# Altium PCB 333.PcbDoc (part 1 of 4)
Units mil, origin at the board's own origin, x right, y up, seen from the top; angles counter-clockwise.
Board outline 3897.64 x 5283.46 mil, 2 copper layers (Top Layer, Bottom Layer); 160 components, 17 nets, 480 pads, 300 vias.
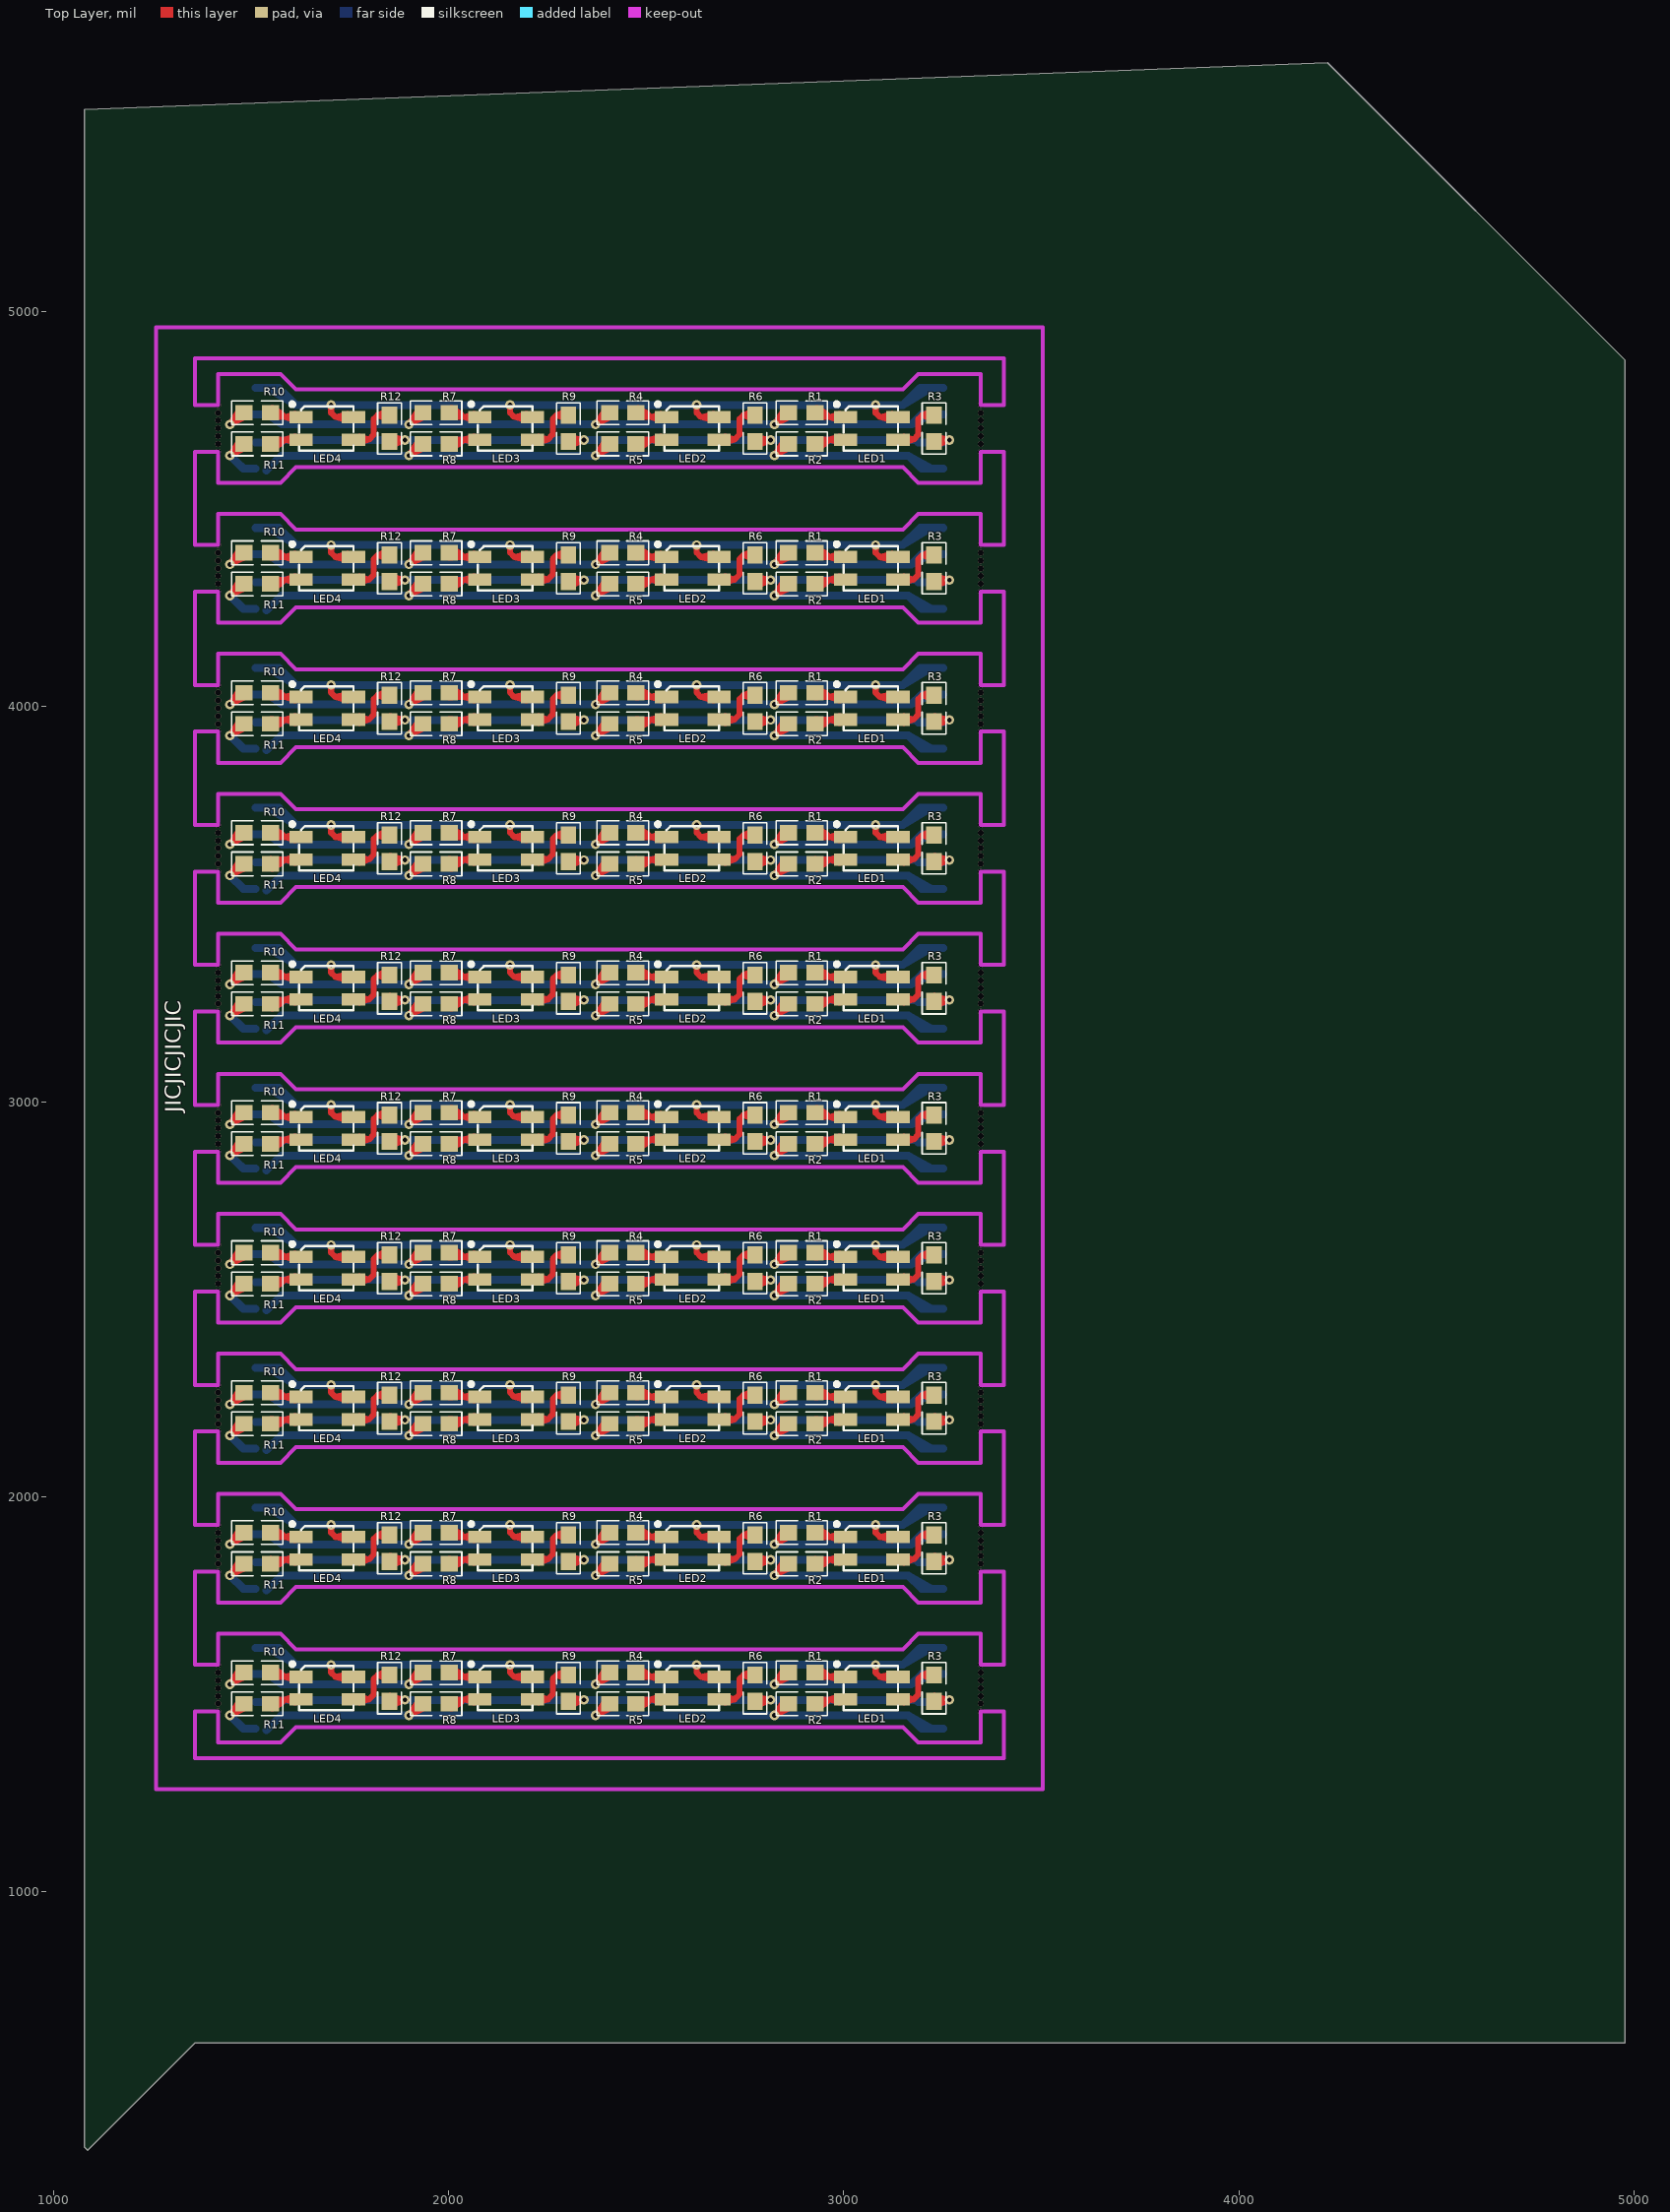
[diagram p0: Top Layer view]
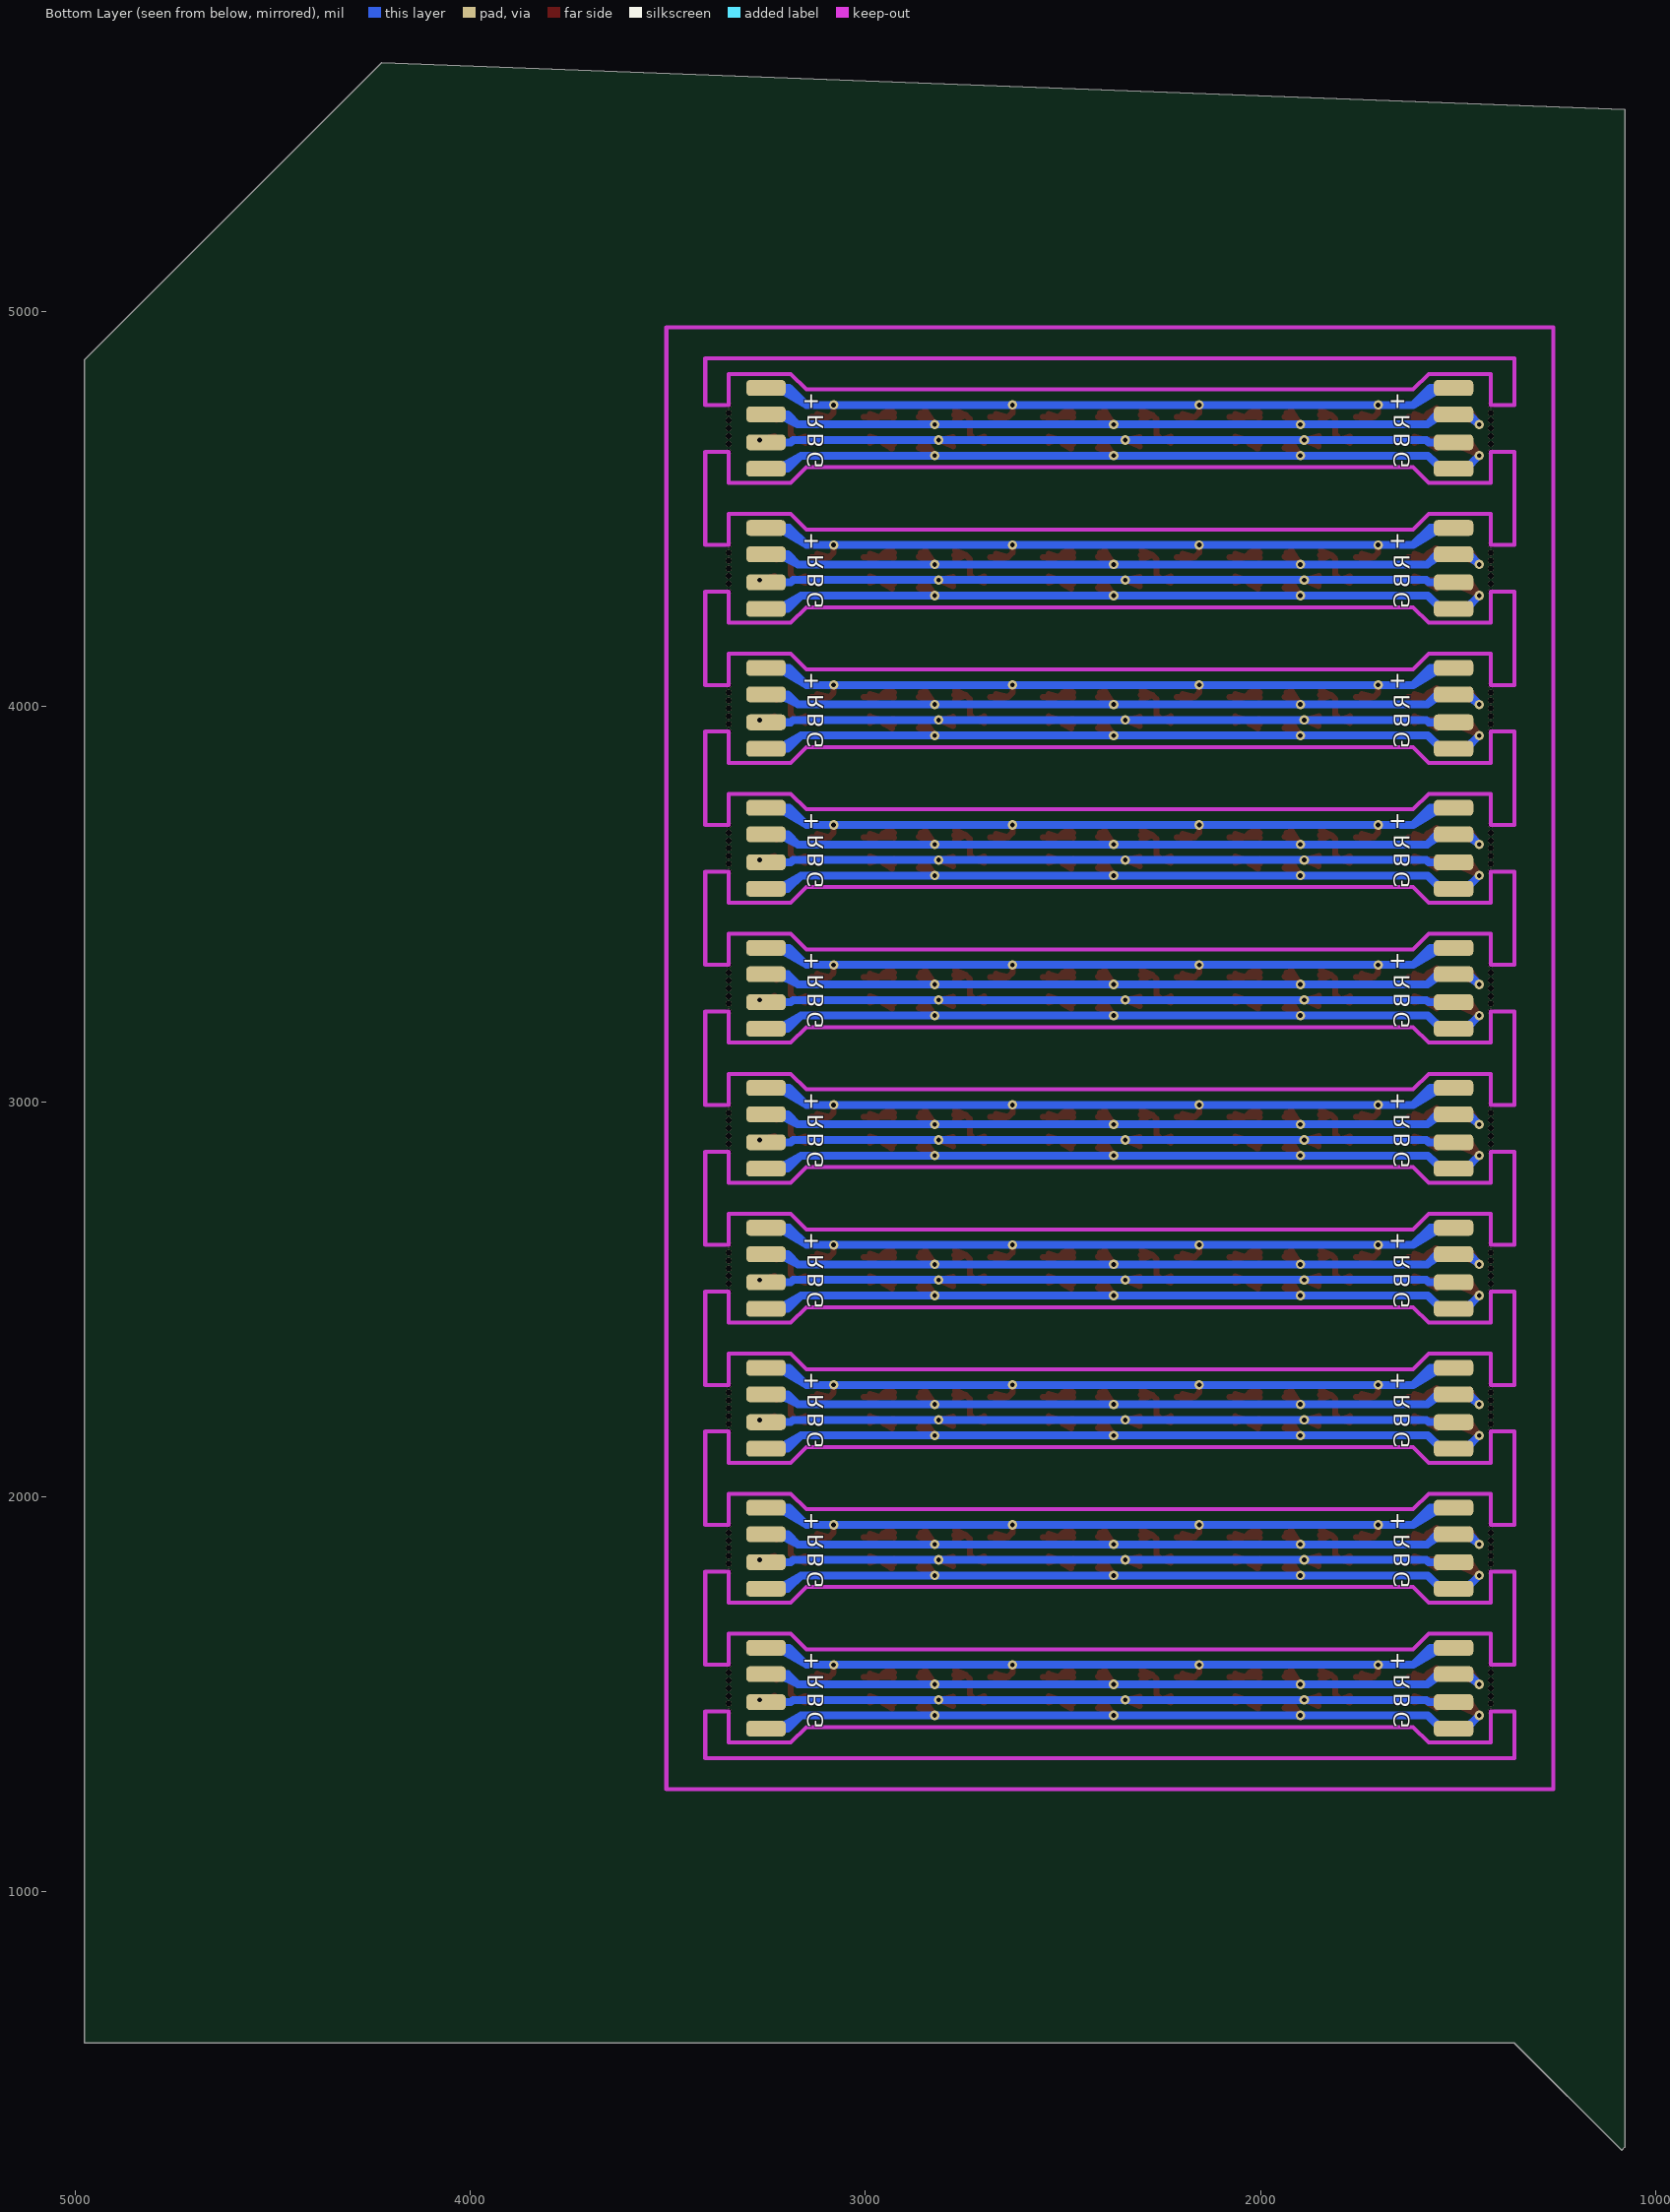
[diagram p1: Bottom Layer view, seen from below]

## Layer stack, top to bottom
Top Layer: signal copper 1.4
Dielectric: dielectric 12.6, FR-4, Dk 4.8
Bottom Layer: signal copper 1.4

## Board outline
1078.74,5511.81 1078.74,354.33 1086.61,346.46 1358.27,618.11 4976.38,618.11 4976.38,4877.95 4224.41,5629.92

## Design rules (kind name [scope] priority, off if disabled: settings)
Clearance [All] p1: gap=10
PolygonConnect [All] p1: connectstyle=Relief reliefconductorwidth=10 reliefentries=4 polygonreliefangle="90 Angle" airgapwidth=10
RoutingVias [All] p1: holewidth=28 width=50 viastyle="Through Hole" minholewidth=28 minwidth=50 maxholewidth=28 maxwidth=50
SolderMaskExpansion [All] p1: expansion=4
Width [All] p1: maxlimit=100 minlimit=10 preferedwidth=10
28 further rules are at their usual default settings.

## Classes and differential pairs
component class 222: LED1 LED2 LED4 R1 R2 R3 R4 R5 R6 R7 R8 R9 R10 R11 R12

## Components (designator, comment, footprint, x,y, rotation, side; value= is the part's Value field where it differs from the comment)
LED1 "RGB-3528" "LED 3528-4Pin" 3070.87,1870.08 r0 top
LED1 "RGB-3528" "LED 3528-4Pin" 3070.87,1515.75 r0 top
LED1 "RGB-3528" "LED 3528-4Pin" 3070.87,2224.41 r0 top
LED1 "RGB-3528" "LED 3528-4Pin" 3070.87,2578.74 r0 top
LED1 "RGB-3528" "LED 3528-4Pin" 3070.87,3996.06 r0 top
LED1 "RGB-3528" "LED 3528-4Pin" 3070.87,3641.73 r0 top
LED1 "RGB-3528" "LED 3528-4Pin" 3070.87,2933.07 r0 top
LED1 "RGB-3528" "LED 3528-4Pin" 3070.87,3287.4 r0 top
LED1 "RGB-3528" "LED 3528-4Pin" 3070.87,4350.39 r0 top
LED1 "RGB-3528" "LED 3528-4Pin" 3070.87,4704.72 r0 top
LED2 "RGB-3528" "LED 3528-4Pin" 2618.11,1870.08 r0 top
LED2 "RGB-3528" "LED 3528-4Pin" 2618.11,1515.75 r0 top
LED2 "RGB-3528" "LED 3528-4Pin" 2618.11,2224.41 r0 top
LED2 "RGB-3528" "LED 3528-4Pin" 2618.11,2578.74 r0 top
LED2 "RGB-3528" "LED 3528-4Pin" 2618.11,3996.06 r0 top
LED2 "RGB-3528" "LED 3528-4Pin" 2618.11,3641.73 r0 top
LED2 "RGB-3528" "LED 3528-4Pin" 2618.11,2933.07 r0 top
LED2 "RGB-3528" "LED 3528-4Pin" 2618.11,3287.4 r0 top
LED2 "RGB-3528" "LED 3528-4Pin" 2618.11,4350.39 r0 top
LED2 "RGB-3528" "LED 3528-4Pin" 2618.11,4704.72 r0 top
LED3 "RGB-3528" "LED 3528-4Pin" 2145.67,1870.08 r0 top
LED3 "RGB-3528" "LED 3528-4Pin" 2145.67,1515.75 r0 top
LED3 "RGB-3528" "LED 3528-4Pin" 2145.67,2224.41 r0 top
LED3 "RGB-3528" "LED 3528-4Pin" 2145.67,2578.74 r0 top
LED3 "RGB-3528" "LED 3528-4Pin" 2145.67,3996.06 r0 top
LED3 "RGB-3528" "LED 3528-4Pin" 2145.67,3641.73 r0 top
LED3 "RGB-3528" "LED 3528-4Pin" 2145.67,2933.07 r0 top
LED3 "RGB-3528" "LED 3528-4Pin" 2145.67,3287.4 r0 top
LED3 "RGB-3528" "LED 3528-4Pin" 2145.67,4350.39 r0 top
LED3 "RGB-3528" "LED 3528-4Pin" 2145.67,4704.72 r0 top
LED4 "RGB-3528" "LED 3528-4Pin" 1692.91,1870.08 r0 top
LED4 "RGB-3528" "LED 3528-4Pin" 1692.91,1515.75 r0 top
LED4 "RGB-3528" "LED 3528-4Pin" 1692.91,2224.41 r0 top
LED4 "RGB-3528" "LED 3528-4Pin" 1692.91,2578.74 r0 top
LED4 "RGB-3528" "LED 3528-4Pin" 1692.91,3996.06 r0 top
LED4 "RGB-3528" "LED 3528-4Pin" 1692.91,3641.73 r0 top
LED4 "RGB-3528" "LED 3528-4Pin" 1692.91,2933.07 r0 top
LED4 "RGB-3528" "LED 3528-4Pin" 1692.91,3287.4 r0 top
LED4 "RGB-3528" "LED 3528-4Pin" 1692.91,4350.39 r0 top
LED4 "RGB-3528" "LED 3528-4Pin" 1692.91,4704.72 r0 top
R1 "Res1" 0603-1 2893.7,1909.45 r180 top
R1 "Res1" 0603-1 2893.7,1555.12 r180 top
R1 "Res1" 0603-1 2893.7,2263.78 r180 top
R1 "Res1" 0603-1 2893.7,2618.11 r180 top
R1 "Res1" 0603-1 2893.7,4035.43 r180 top
R1 "Res1" 0603-1 2893.7,3681.1 r180 top
R1 "Res1" 0603-1 2893.7,2972.44 r180 top
R1 "Res1" 0603-1 2893.7,3326.77 r180 top
R1 "Res1" 0603-1 2893.7,4389.76 r180 top
R1 "Res1" 0603-1 2893.7,4744.09 r180 top
R2 "Res1" 0603-1 2893.7,1830.71 r180 top
R2 "Res1" 0603-1 2893.7,1476.38 r180 top
R2 "Res1" 0603-1 2893.7,2185.04 r180 top
R2 "Res1" 0603-1 2893.7,2539.37 r180 top
R2 "Res1" 0603-1 2893.7,3956.69 r180 top
R2 "Res1" 0603-1 2893.7,3602.36 r180 top
R2 "Res1" 0603-1 2893.7,2893.7 r180 top
R2 "Res1" 0603-1 2893.7,3248.03 r180 top
R2 "Res1" 0603-1 2893.7,4311.02 r180 top
R2 "Res1" 0603-1 2893.7,4665.35 r180 top
R3 "Res1" 0603-1 3228.35,1870.08 r270 top
R3 "Res1" 0603-1 3228.35,1515.75 r270 top
R3 "Res1" 0603-1 3228.35,2224.41 r270 top
R3 "Res1" 0603-1 3228.35,2578.74 r270 top
R3 "Res1" 0603-1 3228.35,3996.06 r270 top
R3 "Res1" 0603-1 3228.35,3641.73 r270 top
R3 "Res1" 0603-1 3228.35,2933.07 r270 top
R3 "Res1" 0603-1 3228.35,3287.4 r270 top
R3 "Res1" 0603-1 3228.35,4350.39 r270 top
R3 "Res1" 0603-1 3228.35,4704.72 r270 top
R4 "Res1" 0603-1 2440.94,1909.45 r180 top
R4 "Res1" 0603-1 2440.94,1555.12 r180 top
R4 "Res1" 0603-1 2440.94,2263.78 r180 top
R4 "Res1" 0603-1 2440.94,2618.11 r180 top
R4 "Res1" 0603-1 2440.94,4035.43 r180 top
R4 "Res1" 0603-1 2440.94,3681.1 r180 top
R4 "Res1" 0603-1 2440.94,2972.44 r180 top
R4 "Res1" 0603-1 2440.94,3326.77 r180 top
R4 "Res1" 0603-1 2440.94,4389.76 r180 top
R4 "Res1" 0603-1 2440.94,4744.09 r180 top
R5 "Res1" 0603-1 2440.94,1830.71 r180 top
R5 "Res1" 0603-1 2440.94,1476.38 r180 top
R5 "Res1" 0603-1 2440.94,2185.04 r180 top
R5 "Res1" 0603-1 2440.94,2539.37 r180 top
R5 "Res1" 0603-1 2440.94,3956.69 r180 top
R5 "Res1" 0603-1 2440.94,3602.36 r180 top
R5 "Res1" 0603-1 2440.94,2893.7 r180 top
R5 "Res1" 0603-1 2440.94,3248.03 r180 top
R5 "Res1" 0603-1 2440.94,4311.02 r180 top
R5 "Res1" 0603-1 2440.94,4665.35 r180 top
R6 "Res1" 0603-1 2775.59,1870.08 r270 top
R6 "Res1" 0603-1 2775.59,1515.75 r270 top
R6 "Res1" 0603-1 2775.59,2224.41 r270 top
R6 "Res1" 0603-1 2775.59,2578.74 r270 top
R6 "Res1" 0603-1 2775.59,3996.06 r270 top
R6 "Res1" 0603-1 2775.59,3641.73 r270 top
R6 "Res1" 0603-1 2775.59,2933.07 r270 top
R6 "Res1" 0603-1 2775.59,3287.4 r270 top
R6 "Res1" 0603-1 2775.59,4350.39 r270 top
R6 "Res1" 0603-1 2775.59,4704.72 r270 top
R7 "Res1" 0603-1 1968.5,1909.45 r180 top
R7 "Res1" 0603-1 1968.5,1555.12 r180 top
R7 "Res1" 0603-1 1968.5,2263.78 r180 top
R7 "Res1" 0603-1 1968.5,2618.11 r180 top
R7 "Res1" 0603-1 1968.5,4035.43 r180 top
R7 "Res1" 0603-1 1968.5,3681.1 r180 top
R7 "Res1" 0603-1 1968.5,2972.44 r180 top
R7 "Res1" 0603-1 1968.5,3326.77 r180 top
R7 "Res1" 0603-1 1968.5,4389.76 r180 top
R7 "Res1" 0603-1 1968.5,4744.09 r180 top
R8 "Res1" 0603-1 1968.5,1830.71 r180 top
R8 "Res1" 0603-1 1968.5,1476.38 r180 top
R8 "Res1" 0603-1 1968.5,2185.04 r180 top
R8 "Res1" 0603-1 1968.5,2539.37 r180 top
R8 "Res1" 0603-1 1968.5,3956.69 r180 top
R8 "Res1" 0603-1 1968.5,3602.36 r180 top
R8 "Res1" 0603-1 1968.5,2893.7 r180 top
R8 "Res1" 0603-1 1968.5,3248.03 r180 top
R8 "Res1" 0603-1 1968.5,4311.02 r180 top
R8 "Res1" 0603-1 1968.5,4665.35 r180 top
R9 "Res1" 0603-1 2303.15,1870.08 r270 top
R9 "Res1" 0603-1 2303.15,1515.75 r270 top
R9 "Res1" 0603-1 2303.15,2224.41 r270 top
R9 "Res1" 0603-1 2303.15,2578.74 r270 top
R9 "Res1" 0603-1 2303.15,3996.06 r270 top
R9 "Res1" 0603-1 2303.15,3641.73 r270 top
R9 "Res1" 0603-1 2303.15,2933.07 r270 top
R9 "Res1" 0603-1 2303.15,3287.4 r270 top
R9 "Res1" 0603-1 2303.15,4350.39 r270 top
R9 "Res1" 0603-1 2303.15,4704.72 r270 top
R10 "Res1" 0603-1 1515.75,1909.45 r180 top
R10 "Res1" 0603-1 1515.75,1555.12 r180 top
R10 "Res1" 0603-1 1515.75,2263.78 r180 top
R10 "Res1" 0603-1 1515.75,2618.11 r180 top
R10 "Res1" 0603-1 1515.75,4035.43 r180 top
R10 "Res1" 0603-1 1515.75,3681.1 r180 top
R10 "Res1" 0603-1 1515.75,2972.44 r180 top
R10 "Res1" 0603-1 1515.75,3326.77 r180 top
R10 "Res1" 0603-1 1515.75,4389.76 r180 top
R10 "Res1" 0603-1 1515.75,4744.09 r180 top
R11 "Res1" 0603-1 1515.75,1830.71 r180 top
R11 "Res1" 0603-1 1515.75,1476.38 r180 top
R11 "Res1" 0603-1 1515.75,2185.04 r180 top
R11 "Res1" 0603-1 1515.75,2539.37 r180 top
R11 "Res1" 0603-1 1515.75,3956.69 r180 top
R11 "Res1" 0603-1 1515.75,3602.36 r180 top
R11 "Res1" 0603-1 1515.75,2893.7 r180 top
R11 "Res1" 0603-1 1515.75,3248.03 r180 top
R11 "Res1" 0603-1 1515.75,4311.02 r180 top
R11 "Res1" 0603-1 1515.75,4665.35 r180 top
R12 "Res1" 0603-1 1850.39,1870.08 r270 top
R12 "Res1" 0603-1 1850.39,1515.75 r270 top
R12 "Res1" 0603-1 1850.39,2224.41 r270 top
R12 "Res1" 0603-1 1850.39,2578.74 r270 top
R12 "Res1" 0603-1 1850.39,3996.06 r270 top
R12 "Res1" 0603-1 1850.39,3641.73 r270 top
R12 "Res1" 0603-1 1850.39,2933.07 r270 top
R12 "Res1" 0603-1 1850.39,3287.4 r270 top
R12 "Res1" 0603-1 1850.39,4350.39 r270 top
R12 "Res1" 0603-1 1850.39,4704.72 r270 top

## Footprints (in the part's own frame and the unit in brackets; to place one, negate y for a bottom-side part, rotate by r counter-clockwise, add the part's x,y. Pads: shape width x height; smd on the part's side, far side on the other; paste and mask are expansions set on the pad)
0603-1 [mm] "贴片带丝印"
  rect 1.1x1 smd: 1(-0.85,0) 2(0.85,0)
  silkscreen extent -1.65,-0.76 1.65,0.76, body extent -1.14,-0.38 1.14,0.38, height 1
"LED 3528-4Pin" [mm] "4脚，3528LED"
  rect 1.5x0.8 smd: 1(-1.689,0.725) 2(-1.689,-0.725) 3(1.689,-0.725) 4(1.689,0.725)
  silkscreen extent -2.37,-1.42 1.69,1.68, body extent -1.75,-1.4 1.75,1.4, height 1.95

## Part data
LED1 LED1 LED1 LED1 LED1 LED1 LED1 LED1 LED1 LED1 LED2 LED2 LED2 LED2 LED2 LED2 LED2 LED2 LED2 LED2 LED3 LED3 LED3 LED3 LED3 LED3 LED3 LED3 LED3 LED3 LED4 LED4 LED4 LED4 LED4 LED4 LED4 LED4 LED4 LED4: library part LED-RGB-3528, "三基色LED"
R1 R1 R1 R1 R1 R1 R1 R1 R1 R1 R2 R2 R2 R2 R2 R2 R2 R2 R2 R2 R3 R3 R3 R3 R3 R3 R3 R3 R3 R3 R4 R4 R4 R4 R4 R4 R4 R4 R4 R4 R5 R5 R5 R5 R5 R5 R5 R5 R5 R5 R6 R6 R6 R6 R6 R6 R6 R6 R6 R6 R7 R7 R7 R7 R7 R7 R7 R7 R7 R7 R8 R8 R8 R8 R8 R8 R8 R8 R8 R8 R9 R9 R9 R9 R9 R9 R9 R9 R9 R9 R10 R10 R10 R10 R10 R10 R10 R10 R10 R10 R11 R11 R11 R11 R11 R11 R11 R11 R11 R11 R12 R12 R12 R12 R12 R12 R12 R12 R12 R12: "贴片电阻"

## Free pads (board coordinates)
  rrect50% 100x40 smd far side: 2(1511.81,1413.39) 2(1511.81,1480.32) 2(1511.81,1551.18) 2(1511.81,1618.11) 2(1511.81,1767.72) 2(1511.81,1834.65) 2(1511.81,1905.51) 2(1511.81,1972.44) 2(1511.81,2122.05) 2(1511.81,2188.98) 2(1511.81,2259.84) 2(1511.81,2326.77) 2(1511.81,2476.38) 2(1511.81,2543.31) 2(1511.81,2614.17) 2(1511.81,2681.1) 2(1511.81,2830.71) 2(1511.81,2897.64) 2(1511.81,2968.5) 2(1511.81,3035.43) 2(1511.81,3185.04) 2(1511.81,3251.97) 2(1511.81,3322.83) 2(1511.81,3389.76) 2(1511.81,3539.37) 2(1511.81,3606.3) 2(1511.81,3677.17) 2(1511.81,3744.09) 2(1511.81,3893.7) 2(1511.81,3960.63) 2(1511.81,4031.5) 2(1511.81,4098.43) 2(1511.81,4248.03) 2(1511.81,4314.96) 2(1511.81,4385.83) 2(1511.81,4452.76) 2(1511.81,4602.36) 2(1511.81,4669.29) 2(1511.81,4740.16) 2(1511.81,4807.09) 2(3251.97,1413.39) 2(3251.97,1480.32) 2(3251.97,1551.18) 2(3251.97,1618.11) 2(3251.97,1767.72) 2(3251.97,1834.65) 2(3251.97,1905.51) 2(3251.97,1972.44) 2(3251.97,2122.05) 2(3251.97,2188.98) 2(3251.97,2259.84) 2(3251.97,2326.77) 2(3251.97,2476.38) 2(3251.97,2543.31) 2(3251.97,2614.17) 2(3251.97,2681.1) 2(3251.97,2830.71) 2(3251.97,2897.64) 2(3251.97,2968.5) 2(3251.97,3035.43) 2(3251.97,3185.04) 2(3251.97,3251.97) 2(3251.97,3322.83) 2(3251.97,3389.76) 2(3251.97,3539.37) 2(3251.97,3606.3) 2(3251.97,3677.17) 2(3251.97,3744.09) 2(3251.97,3893.7) 2(3251.97,3960.63) 2(3251.97,4031.5) 2(3251.97,4098.43) 2(3251.97,4248.03) 2(3251.97,4314.96) 2(3251.97,4385.83) 2(3251.97,4452.76) 2(3251.97,4602.36) 2(3251.97,4669.29) 2(3251.97,4740.16) 2(3251.97,4807.09)

## Via types
v1: diameter 24, hole 12, Top Layer to Bottom Layer, 160 vias
v2: diameter 15, hole 15, Top Layer to Bottom Layer, 140 vias

## Nets (pads, with @x,y where several pads share a name; then routed paths per layer and width w, separated by ;. In a path a pad name is that pad's centre, name@x,y a point inside that pad or via, vN(x,y) a via of type N, cw(c..) or ccw(c..) an arc to the next point about the centre after c; other vN are vias at no path point)
B: pad.2@1511.81,1834.65 pad.2@3251.97,1834.65 R3.2@3228.35,1836.61 R6.2@2775.59,1836.61 R9.2@2303.15,1836.61 R12.2@1850.39,1836.61 | length 3790.4
  Top Layer w15: R12.2@1850.39,1836.61 v1(1889.76,1840.55) ; R12.2@1850.39,1836.61 v1(1889.76,1840.55) ; R12.2@1850.39,1836.61 1875.98,1836.61 ; R12.2@1850.39,1836.61 1875.98,1836.61 ; R12.2@1853.29,1824.78 v1(1889.76,1840.55) ; R12.2@1853.29,1824.78 v1(1889.76,1840.55) ; R12.2@1853.29,1824.78 1875.98,1836.61 ; R12.2@1853.29,1824.78 1875.98,1836.61 ; R12.2@1853.29,1848.45 v1(1889.76,1840.55) ; R12.2@1853.29,1848.45 v1(1889.76,1840.55) ; R12.2@1853.29,1848.45 1875.98,1836.61 ; R12.2@1853.29,1848.45 1875.98,1836.61 ; 1875.98,1836.61 v1(1889.76,1840.55) ; 1875.98,1836.61 v1(1889.76,1840.55) ; 1875.98,1836.61 v1(1889.76,1840.55) ; 1875.98,1836.61 v1(1889.76,1840.55) ; 1875.98,1836.61 v1(1889.76,1840.55) ; 1875.98,1836.61 v1(1889.76,1840.55) ; 1875.98,1836.61 v1(1889.76,1840.55) ; 1875.98,1836.61 v1@1879.92,1840.55 ; v1@1879.92,1840.55 1850.39,1838.58 v1(1889.76,1840.55) ; v1@1879.92,1840.55 1853.69,1826.85 v1(1889.76,1840.55) ; v1@1879.92,1840.55 1852.1,1850.65 v1(1889.76,1840.55) ; v1@1879.92,1840.55 v1(1889.76,1840.55) ; 2328.74,1836.61 v1(2342.52,1840.55) ; 2328.74,1836.61 v1(2342.52,1840.55) ; 2328.74,1836.61 v1(2342.52,1840.55) ; 2328.74,1836.61 2306.05,1824.78 v1(2342.52,1840.55) ; 2328.74,1836.61 2306.05,1848.45 v1(2342.52,1840.55) ; 2328.74,1836.61 R9.2@2303.15,1836.61 v1(2342.52,1840.55) ; 2801.18,1836.61 v1(2814.96,1840.55) ; 2801.18,1836.61 v1(2814.96,1840.55) ; 2801.18,1836.61 v1(2814.96,1840.55) ; 2801.18,1836.61 2778.49,1824.78 v1(2814.96,1840.55) ; 2801.18,1836.61 2778.49,1848.45 v1(2814.96,1840.55) ; 2801.18,1836.61 R6.2@2775.59,1836.61 v1(2814.96,1840.55) ; R3.2@3228.35,1836.61 v1(3267.72,1840.55) ; R3.2@3228.35,1836.61 v1(3267.72,1840.55) ; R3.2@3228.35,1836.61 3253.94,1836.61 ; R3.2@3228.35,1836.61 3253.94,1836.61 ; R3.2@3231.25,1824.78 v1(3267.72,1840.55) ; R3.2@3231.25,1824.78 v1(3267.72,1840.55) ; R3.2@3231.25,1824.78 3253.94,1836.61 ; R3.2@3231.25,1824.78 3253.94,1836.61 ; R3.2@3231.25,1848.45 v1(3267.72,1840.55) ; R3.2@3231.25,1848.45 v1(3267.72,1840.55) ; R3.2@3231.25,1848.45 3253.94,1836.61 ; R3.2@3231.25,1848.45 3253.94,1836.61 ; 3253.94,1836.61 v1(3267.72,1840.55) ; 3253.94,1836.61 v1(3267.72,1840.55) ; 3253.94,1836.61 v1(3267.72,1840.55) ; 3253.94,1836.61 v1(3267.72,1840.55) ; 3253.94,1836.61 v1(3267.72,1840.55) ; 3253.94,1836.61 v1(3267.72,1840.55) ; 3253.94,1836.61 v1(3267.72,1840.55) ; 3253.94,1836.61 v1@3257.87,1840.55 ; v1@3257.87,1840.55 3228.35,1838.58 v1(3267.72,1840.55) ; v1@3257.87,1840.55 3231.64,1826.85 v1(3267.72,1840.55) ; v1@3257.87,1840.55 3230.06,1850.65 v1(3267.72,1840.55) ; v1@3257.87,1840.55 v1(3267.72,1840.55)
  Bottom Layer w20: pad.2@1511.81,1834.65 1574.8,1834.65 ; pad.2@1541.81,1834.65 1574.8,1834.65 ; 3194.71,1834.65 v1(3267.72,1840.55) pad.2@3251.97,1834.65 3188.98,1834.65 ; pad.2@3221.97,1834.65 3188.98,1834.65 ; 1574.8,1834.65 1580.71,1840.55 v1(1889.76,1840.55) v1(2342.52,1840.55) v1(2814.96,1840.55) 3183.07,1840.55 3188.98,1834.65
G: pad.2@1511.81,1767.72 pad.2@3251.97,1767.72 R2.2@2860.24,1830.71 R5.2@2407.48,1830.71 R8.2@1935.04,1830.71 R11.2@1482.28,1830.71 | length 2761.5
  Top Layer w15: R11.2@1471.08,1838.66 v1(1446.85,1801.18) ; R11.2@1480.31,1830.71 v1(1446.85,1801.18) ; R11.2@1482.28,1830.71 1476.38,1830.71 v1(1446.85,1801.18) ; R11.2@1487.05,1820.56 v1(1446.85,1801.18) ; R8.2@1923.84,1838.66 v1(1899.61,1801.18) ; R8.2@1933.07,1830.71 v1(1899.61,1801.18) ; R8.2@1935.04,1830.71 1929.13,1830.71 v1(1899.61,1801.18) ; R8.2@1939.81,1820.56 v1(1899.61,1801.18) ; R5.2@2396.28,1838.66 v1(2372.05,1801.18) ; R5.2@2405.51,1830.71 v1(2372.05,1801.18) ; R5.2@2407.48,1830.71 2401.57,1830.71 v1(2372.05,1801.18) ; R5.2@2412.25,1820.56 v1(2372.05,1801.18) ; R2.2@2849.03,1838.66 v1(2824.8,1801.18) ; R2.2@2858.27,1830.71 v1(2824.8,1801.18) ; R2.2@2860.24,1830.71 2854.33,1830.71 v1(2824.8,1801.18) ; R2.2@2865.01,1820.56 v1(2824.8,1801.18)
  Bottom Layer w20: pad.2@1481.81,1767.72 v1(1446.85,1801.18) 1480.32,1767.72 pad.2@1511.81,1767.72 ; pad.2@1539.37,1763.78 1576.77,1801.18 ; pad.2@1541.81,1767.72 1576.77,1801.18 ; pad.2@3251.97,1767.72 3196.85,1767.72 ; 1576.77,1801.18 v1(1899.61,1801.18) v1(2372.05,1801.18) v1(2824.8,1801.18) 3163.39,1801.18 ; 3163.39,1801.18 pad.2@3221.97,1767.72 ; 3163.39,1801.18 3196.85,1767.72 ; 3196.85,1767.72 pad.2@3221.97,1767.72 ; 3196.85,1767.72 pad.2@3221.97,1767.72
GND: 
NetLED1_1: LED1.1@3004.37,1898.62 R1.1@2927.17,1909.45 | length 412.8
  Top Layer w15: R1.1@2927.17,1909.45 2952.76,1909.45 ; R1.1@2927.49,1897.37 2963.58,1898.62 ; R1.1@2934.7,1920.29 2963.58,1898.62 ; LED1.1@2989.33,1890.47 2963.58,1898.62 ; LED1.1@2989.33,1906.77 2963.58,1898.62 ; LED1.1@2990.59,1898.62 2963.58,1898.62 ; LED1.1@3004.37,1898.62 2963.58,1898.62 ; R1.1@2929.13,1909.45 2952.76,1909.45 ; R1.1@2929.13,1909.45 2952.76,1909.45 ; R1.1@2929.13,1909.45 2963.58,1898.62 ; 2952.76,1909.45 2932.28,1897.68 2952.76,1909.45 ; 2952.76,1909.45 2932.28,1921.22 2952.76,1909.45 ; 2952.76,1909.45 2963.58,1898.62
NetLED1_2: LED1.2@3004.37,1841.54 R2.1@2927.17,1830.71 | length 412.8
  Top Layer w15: R2.1@2927.17,1830.71 2952.76,1830.71 ; R2.1@2927.49,1842.78 2963.58,1841.54 ; R2.1@2934.7,1819.87 2963.58,1841.54 ; LED1.2@2989.33,1833.38 2963.58,1841.54 ; LED1.2@2989.33,1849.69 2963.58,1841.54 ; LED1.2@2990.59,1841.54 2963.58,1841.54 ; LED1.2@3004.37,1841.54 2963.58,1841.54 ; R2.1@2929.13,1830.71 2952.76,1830.71 ; R2.1@2929.13,1830.71 2952.76,1830.71 ; R2.1@2929.13,1830.71 2963.58,1841.54 ; 2952.76,1830.71 2932.28,1818.94 2952.76,1830.71 ; 2952.76,1830.71 2932.28,1842.48 2952.76,1830.71 ; 2952.76,1830.71 2963.58,1841.54
NetLED1_3: LED1.3@3137.37,1841.54 R3.1@3228.35,1903.54 | length 303.4
  Top Layer w15: LED1.3@3137.37,1841.54 3176.18,1841.54 ; LED1.3@3151.15,1841.54 3176.18,1841.54 ; LED1.3@3152.5,1833.4 3176.18,1841.54 ; LED1.3@3152.5,1849.67 3176.18,1841.54 ; R3.1@3225.83,1891.62 3198.82,1903.54 ; R3.1@3225.83,1915.47 3198.82,1903.54 ; 3176.18,1841.54 3188.98,1854.33 3188.98,1893.7 3198.82,1903.54 ; 3198.82,1903.54 R3.1@3228.35,1903.54 3198.82,1903.54
NetLED2_1: LED2.1@2551.61,1898.62 R4.1@2474.41,1909.45 | length 412.8
  Top Layer w15: R4.1@2474.41,1909.45 2500,1909.45 ; R4.1@2474.74,1897.37 2510.83,1898.62 ; R4.1@2481.94,1920.29 2510.83,1898.62 ; LED2.1@2536.57,1890.47 2510.83,1898.62 ; LED2.1@2536.57,1906.77 2510.83,1898.62 ; LED2.1@2537.83,1898.62 2510.83,1898.62 ; LED2.1@2551.61,1898.62 2510.83,1898.62 ; R4.1@2476.38,1909.45 2500,1909.45 ; R4.1@2476.38,1909.45 2500,1909.45 ; R4.1@2476.38,1909.45 2510.83,1898.62 ; 2500,1909.45 2479.52,1897.68 2500,1909.45 ; 2500,1909.45 2479.52,1921.22 2500,1909.45 ; 2500,1909.45 2510.83,1898.62
NetLED2_2: LED2.2@2551.61,1841.54 R5.1@2474.41,1830.71 | length 412.8
  Top Layer w15: R5.1@2474.41,1830.71 2500,1830.71 ; R5.1@2474.74,1842.78 2510.83,1841.54 ; R5.1@2481.94,1819.87 2510.83,1841.54 ; LED2.2@2536.57,1833.38 2510.83,1841.54 ; LED2.2@2536.57,1849.69 2510.83,1841.54 ; LED2.2@2537.83,1841.54 2510.83,1841.54 ; LED2.2@2551.61,1841.54 2510.83,1841.54 ; R5.1@2476.38,1830.71 2500,1830.71 ; R5.1@2476.38,1830.71 2500,1830.71 ; R5.1@2476.38,1830.71 2510.83,1841.54 ; 2500,1830.71 2479.52,1818.94 2500,1830.71 ; 2500,1830.71 2479.52,1842.48 2500,1830.71 ; 2500,1830.71 2510.83,1841.54
NetLED2_3: LED2.3@2684.61,1841.54 R6.1@2775.59,1903.54 | length 303.4
  Top Layer w15: LED2.3@2684.61,1841.54 2723.43,1841.54 ; LED2.3@2698.39,1841.54 2723.43,1841.54 ; LED2.3@2699.75,1833.4 2723.43,1841.54 ; LED2.3@2699.75,1849.67 2723.43,1841.54 ; R6.1@2773.08,1891.62 2746.06,1903.54 ; R6.1@2773.08,1915.47 2746.06,1903.54 ; 2723.43,1841.54 2736.22,1854.33 2736.22,1893.7 2746.06,1903.54 ; 2746.06,1903.54 R6.1@2775.59,1903.54 2746.06,1903.54
NetLED3_1: LED3.1@2079.17,1898.62 R7.1@2001.97,1909.45 | length 412.8
  Top Layer w15: R7.1@2001.97,1909.45 2027.56,1909.45 ; R7.1@2002.3,1897.37 2038.39,1898.62 ; R7.1@2009.5,1920.29 2038.39,1898.62 ; LED3.1@2064.13,1890.47 2038.39,1898.62 ; LED3.1@2064.13,1906.77 2038.39,1898.62 ; LED3.1@2065.39,1898.62 2038.39,1898.62 ; LED3.1@2079.17,1898.62 2038.39,1898.62 ; R7.1@2003.94,1909.45 2027.56,1909.45 ; R7.1@2003.94,1909.45 2027.56,1909.45 ; R7.1@2003.94,1909.45 2038.39,1898.62 ; 2027.56,1909.45 2007.08,1897.68 2027.56,1909.45 ; 2027.56,1909.45 2007.08,1921.22 2027.56,1909.45 ; 2027.56,1909.45 2038.39,1898.62
NetLED3_2: LED3.2@2079.17,1841.54 R8.1@2001.97,1830.71 | length 412.8
  Top Layer w15: R8.1@2001.97,1830.71 2027.56,1830.71 ; R8.1@2002.3,1842.78 2038.39,1841.54 ; R8.1@2009.5,1819.87 2038.39,1841.54 ; LED3.2@2064.13,1833.38 2038.39,1841.54 ; LED3.2@2064.13,1849.69 2038.39,1841.54 ; LED3.2@2065.39,1841.54 2038.39,1841.54 ; LED3.2@2079.17,1841.54 2038.39,1841.54 ; R8.1@2003.94,1830.71 2027.56,1830.71 ; R8.1@2003.94,1830.71 2027.56,1830.71 ; R8.1@2003.94,1830.71 2038.39,1841.54 ; 2027.56,1830.71 2007.08,1818.94 2027.56,1830.71 ; 2027.56,1830.71 2007.08,1842.48 2027.56,1830.71 ; 2027.56,1830.71 2038.39,1841.54
NetLED3_3: LED3.3@2212.17,1841.54 R9.1@2303.15,1903.54 | length 273.9
  Top Layer w15: LED3.3@2212.17,1841.54 2250.98,1841.54 ; LED3.3@2225.95,1841.54 2250.98,1841.54 ; LED3.3@2227.31,1833.4 2250.98,1841.54 ; LED3.3@2227.31,1849.67 2250.98,1841.54 ; R9.1@2300.64,1891.62 2273.62,1903.54 ; R9.1@2300.64,1915.47 2273.62,1903.54 ; R9.1@2303.15,1903.54 2273.62,1903.54 ; 2250.98,1841.54 2263.78,1854.33 2263.78,1893.7 2273.62,1903.54
NetLED4_1: LED4.1@1626.41,1898.62 R10.1@1549.21,1909.45 | length 412.8
  Top Layer w15: R10.1@1549.21,1909.45 1574.8,1909.45 ; R10.1@1549.54,1897.37 1585.63,1898.62 ; R10.1@1556.74,1920.29 1585.63,1898.62 ; LED4.1@1611.37,1890.47 1585.63,1898.62 ; LED4.1@1611.37,1906.77 1585.63,1898.62 ; LED4.1@1612.63,1898.62 1585.63,1898.62 ; LED4.1@1626.41,1898.62 1585.63,1898.62 ; R10.1@1551.18,1909.45 1574.8,1909.45 ; R10.1@1551.18,1909.45 1574.8,1909.45 ; R10.1@1551.18,1909.45 1585.63,1898.62 ; 1574.8,1909.45 1554.32,1897.68 1574.8,1909.45 ; 1574.8,1909.45 1554.32,1921.22 1574.8,1909.45 ; 1574.8,1909.45 1585.63,1898.62
NetLED4_2: LED4.2@1626.41,1841.54 R11.1@1549.21,1830.71 | length 412.8
  Top Layer w15: R11.1@1549.21,1830.71 1574.8,1830.71 ; R11.1@1549.54,1842.78 1585.63,1841.54 ; R11.1@1556.74,1819.87 1585.63,1841.54 ; LED4.2@1611.37,1833.38 1585.63,1841.54 ; LED4.2@1611.37,1849.69 1585.63,1841.54 ; LED4.2@1612.63,1841.54 1585.63,1841.54 ; LED4.2@1626.41,1841.54 1585.63,1841.54 ; R11.1@1551.18,1830.71 1574.8,1830.71 ; R11.1@1551.18,1830.71 1585.63,1841.54 ; R11.1@1551.18,1830.71 1574.8,1830.71 ; 1574.8,1830.71 1554.32,1818.94 1574.8,1830.71 ; 1574.8,1830.71 1554.32,1842.48 1574.8,1830.71 ; 1574.8,1830.71 1585.63,1841.54
NetLED4_3: LED4.3@1759.41,1841.54 R12.1@1850.39,1903.54 | length 273.9
  Top Layer w15: LED4.3@1759.41,1841.54 1798.23,1841.54 ; LED4.3@1773.19,1841.54 1798.23,1841.54 ; LED4.3@1774.55,1833.4 1798.23,1841.54 ; LED4.3@1774.55,1849.67 1798.23,1841.54 ; R12.1@1847.88,1891.62 1820.87,1903.54 ; R12.1@1847.88,1915.47 1820.87,1903.54 ; R12.1@1850.39,1903.54 1820.87,1903.54 ; 1798.23,1841.54 1811.02,1854.33 1811.02,1893.7 1820.87,1903.54
R: pad.2@1511.81,1905.51 pad.2@3251.97,1905.51 R1.2@2860.24,1909.45 R4.2@2407.48,1909.45 R7.2@1935.04,1909.45 R10.2@1482.28,1909.45 | length 2758.4
  Top Layer w15: R10.2@1471.08,1917.4 v1(1446.85,1879.92) ; R10.2@1480.31,1909.45 v1(1446.85,1879.92) ; R10.2@1482.28,1909.45 1476.38,1909.45 v1(1446.85,1879.92) ; R10.2@1487.05,1899.3 v1(1446.85,1879.92) ; R7.2@1923.84,1917.4 v1(1899.61,1879.92) ; R7.2@1933.07,1909.45 v1(1899.61,1879.92) ; R7.2@1935.04,1909.45 1929.13,1909.45 v1(1899.61,1879.92) ; R7.2@1939.81,1899.3 v1(1899.61,1879.92) ; R4.2@2396.28,1917.4 v1(2372.05,1879.92) ; R4.2@2405.51,1909.45 v1(2372.05,1879.92) ; R4.2@2407.48,1909.45 2401.57,1909.45 v1(2372.05,1879.92) ; R4.2@2412.25,1899.3 v1(2372.05,1879.92) ; R1.2@2849.03,1917.4 v1(2824.8,1879.92) ; R1.2@2858.27,1909.45 v1(2824.8,1879.92) ; R1.2@2860.24,1909.45 2854.33,1909.45 v1(2824.8,1879.92) ; R1.2@2865.01,1899.3 v1(2824.8,1879.92)
  Bottom Layer w20: pad.2@1481.81,1905.51 v1(1446.85,1879.92) 1472.44,1905.51 pad.2@1511.81,1905.51 1553.15,1905.51 1578.74,1879.92 ; pad.2@1541.81,1905.51 1578.74,1879.92 ; pad.2@3251.97,1905.51 3196.85,1905.51 ; 1578.74,1879.92 v1(1899.61,1879.92) v1(2372.05,1879.92) v1(2824.8,1879.92) 3171.26,1879.92 ; 3171.26,1879.92 pad.2@3221.97,1905.51 ; 3171.26,1879.92 3196.85,1905.51 ; 3196.85,1905.51 pad.2@3221.97,1905.51 ; 3196.85,1905.51 pad.2@3221.97,1905.51
VCC: LED1.4@3137.37,1898.62 LED2.4@2684.61,1898.62 LED3.4@2212.17,1898.62 LED4.4@1759.41,1898.62 pad.2@1511.81,1972.44 pad.2@3251.97,1972.44 | length 2768.8
  Top Layer w15: v1(1702.76,1929.13) 1702.76,1909.45 1713.58,1898.62 ; LED4.4@1744.57,1890.44 1713.58,1898.62 ; LED4.4@1744.57,1906.8 1713.58,1898.62 ; LED4.4@1745.63,1898.62 1713.58,1898.62 ; LED4.4@1759.41,1898.62 1713.58,1898.62 ; v1(2155.51,1929.13) 2155.51,1909.45 2166.34,1898.62 ; LED3.4@2197.33,1890.44 2166.34,1898.62 ; LED3.4@2197.33,1906.8 2166.34,1898.62 ; LED3.4@2198.39,1898.62 2166.34,1898.62 ; LED3.4@2212.17,1898.62 2166.34,1898.62 ; v1(2627.95,1929.13) 2627.95,1909.45 2638.78,1898.62 ; LED2.4@2669.77,1890.44 2638.78,1898.62 ; LED2.4@2669.77,1906.8 2638.78,1898.62 ; LED2.4@2670.83,1898.62 2638.78,1898.62 ; LED2.4@2684.61,1898.62 2638.78,1898.62 ; v1(3080.71,1929.13) 3080.71,1909.45 3091.54,1898.62 ; LED1.4@3122.53,1890.44 3091.54,1898.62 ; LED1.4@3122.53,1906.8 3091.54,1898.62 ; LED1.4@3123.59,1898.62 3091.54,1898.62 ; LED1.4@3137.37,1898.62 3091.54,1898.62
  Bottom Layer w20: pad.2@1511.81,1972.44 1570.87,1972.44 ; pad.2@3251.97,1972.44 3192.91,1972.44 ; pad.2@1541.81,1972.44 1570.87,1972.44 ; pad.2@1541.81,1972.44 1614.17,1929.13 ; pad.2@1541.81,1972.44 1570.87,1972.44 ; 1570.87,1972.44 1614.17,1929.13 ; 1614.17,1929.13 v1(1702.76,1929.13) v1(2155.51,1929.13) v1(2627.95,1929.13) v1(3080.71,1929.13) 3149.61,1929.13 ; 3149.61,1929.13 pad.2@3221.97,1972.44 ; 3149.61,1929.13 3192.91,1972.44 ; 3192.91,1972.44 pad.2@3221.97,1972.44 ; 3192.91,1972.44 pad.2@3221.97,1972.44
pads on no net: LED1.1@3004.37,1544.29 LED1.1@3004.37,2252.95 LED1.1@3004.37,2607.28 LED1.1@3004.37,2961.61 LED1.1@3004.37,3315.94 LED1.1@3004.37,3670.28 LED1.1@3004.37,4024.61 LED1.1@3004.37,4378.94 LED1.1@3004.37,4733.27 LED1.2@3004.37,1487.2 LED1.2@3004.37,2195.87 LED1.2@3004.37,2550.2 LED1.2@3004.37,2904.53 LED1.2@3004.37,3258.86 LED1.2@3004.37,3613.19 LED1.2@3004.37,3967.52 LED1.2@3004.37,4321.85 LED1.2@3004.37,4676.18 LED1.3@3137.37,1487.2 LED1.3@3137.37,2195.87 LED1.3@3137.37,2550.2 LED1.3@3137.37,2904.53 LED1.3@3137.37,3258.86 LED1.3@3137.37,3613.19 LED1.3@3137.37,3967.52 LED1.3@3137.37,4321.85 LED1.3@3137.37,4676.18 LED1.4@3137.37,1544.29 LED1.4@3137.37,2252.95 LED1.4@3137.37,2607.28 LED1.4@3137.37,2961.61 LED1.4@3137.37,3315.94 LED1.4@3137.37,3670.28 LED1.4@3137.37,4024.61 LED1.4@3137.37,4378.94 LED1.4@3137.37,4733.27 LED2.1@2551.61,1544.29 LED2.1@2551.61,2252.95 LED2.1@2551.61,2607.28 LED2.1@2551.61,2961.61 LED2.1@2551.61,3315.94 LED2.1@2551.61,3670.28 LED2.1@2551.61,4024.61 LED2.1@2551.61,4378.94 LED2.1@2551.61,4733.27 LED2.2@2551.61,1487.2 LED2.2@2551.61,2195.87 LED2.2@2551.61,2550.2 LED2.2@2551.61,2904.53 LED2.2@2551.61,3258.86 LED2.2@2551.61,3613.19 LED2.2@2551.61,3967.52 LED2.2@2551.61,4321.85 LED2.2@2551.61,4676.18 LED2.3@2684.61,1487.2 LED2.3@2684.61,2195.87 LED2.3@2684.61,2550.2 LED2.3@2684.61,2904.53 LED2.3@2684.61,3258.86 LED2.3@2684.61,3613.19 LED2.3@2684.61,3967.52 LED2.3@2684.61,4321.85 LED2.3@2684.61,4676.18 LED2.4@2684.61,1544.29 LED2.4@2684.61,2252.95 LED2.4@2684.61,2607.28 LED2.4@2684.61,2961.61 LED2.4@2684.61,3315.94 LED2.4@2684.61,3670.28 LED2.4@2684.61,4024.61 LED2.4@2684.61,4378.94 LED2.4@2684.61,4733.27 LED3.1@2079.17,1544.29 LED3.1@2079.17,2252.95 LED3.1@2079.17,2607.28 LED3.1@2079.17,2961.61 LED3.1@2079.17,3315.94 LED3.1@2079.17,3670.28 LED3.1@2079.17,4024.61 LED3.1@2079.17,4378.94 LED3.1@2079.17,4733.27 LED3.2@2079.17,1487.2 LED3.2@2079.17,2195.87 LED3.2@2079.17,2550.2 LED3.2@2079.17,2904.53 LED3.2@2079.17,3258.86 LED3.2@2079.17,3613.19 LED3.2@2079.17,3967.52 LED3.2@2079.17,4321.85 LED3.2@2079.17,4676.18 LED3.3@2212.17,1487.2 LED3.3@2212.17,2195.87 LED3.3@2212.17,2550.2 LED3.3@2212.17,2904.53 LED3.3@2212.17,3258.86 LED3.3@2212.17,3613.19 LED3.3@2212.17,3967.52 LED3.3@2212.17,4321.85 LED3.3@2212.17,4676.18 LED3.4@2212.17,1544.29 LED3.4@2212.17,2252.95 LED3.4@2212.17,2607.28 LED3.4@2212.17,2961.61 LED3.4@2212.17,3315.94 LED3.4@2212.17,3670.28 LED3.4@2212.17,4024.61 LED3.4@2212.17,4378.94 LED3.4@2212.17,4733.27 LED4.1@1626.41,1544.29 LED4.1@1626.41,2252.95 LED4.1@1626.41,2607.28 LED4.1@1626.41,2961.61 LED4.1@1626.41,3315.94 LED4.1@1626.41,3670.28 LED4.1@1626.41,4024.61 LED4.1@1626.41,4378.94 LED4.1@1626.41,4733.27 LED4.2@1626.41,1487.2 LED4.2@1626.41,2195.87 LED4.2@1626.41,2550.2 LED4.2@1626.41,2904.53 LED4.2@1626.41,3258.86 LED4.2@1626.41,3613.19 LED4.2@1626.41,3967.52 LED4.2@1626.41,4321.85 LED4.2@1626.41,4676.18 LED4.3@1759.41,1487.2 LED4.3@1759.41,2195.87 LED4.3@1759.41,2550.2 LED4.3@1759.41,2904.53 LED4.3@1759.41,3258.86 LED4.3@1759.41,3613.19 LED4.3@1759.41,3967.52 LED4.3@1759.41,4321.85 LED4.3@1759.41,4676.18 LED4.4@1759.41,1544.29 LED4.4@1759.41,2252.95 LED4.4@1759.41,2607.28 LED4.4@1759.41,2961.61 LED4.4@1759.41,3315.94 LED4.4@1759.41,3670.28 LED4.4@1759.41,4024.61 LED4.4@1759.41,4378.94 LED4.4@1759.41,4733.27 R1.1@2927.17,1555.12 R1.1@2927.17,2263.78 R1.1@2927.17,2618.11 R1.1@2927.17,2972.44 R1.1@2927.17,3326.77 R1.1@2927.17,3681.1 R1.1@2927.17,4035.43 R1.1@2927.17,4389.76 R1.1@2927.17,4744.09 R1.2@2860.24,1555.12 R1.2@2860.24,2263.78 R1.2@2860.24,2618.11 R1.2@2860.24,2972.44 R1.2@2860.24,3326.77 R1.2@2860.24,3681.1 R1.2@2860.24,4035.43 R1.2@2860.24,4389.76 R1.2@2860.24,4744.09 R2.1@2927.17,1476.38 R2.1@2927.17,2185.04 R2.1@2927.17,2539.37 R2.1@2927.17,2893.7 R2.1@2927.17,3248.03 R2.1@2927.17,3602.36 R2.1@2927.17,3956.69 R2.1@2927.17,4311.02 R2.1@2927.17,4665.35 R2.2@2860.24,1476.38 R2.2@2860.24,2185.04 R2.2@2860.24,2539.37 R2.2@2860.24,2893.7 R2.2@2860.24,3248.03 R2.2@2860.24,3602.36 R2.2@2860.24,3956.69 R2.2@2860.24,4311.02 R2.2@2860.24,4665.35 R3.1@3228.35,1549.21 R3.1@3228.35,2257.87 R3.1@3228.35,2612.2 R3.1@3228.35,2966.54 R3.1@3228.35,3320.87 R3.1@3228.35,3675.2 R3.1@3228.35,4029.53 R3.1@3228.35,4383.86 R3.1@3228.35,4738.19 R3.2@3228.35,1482.28 R3.2@3228.35,2190.94 R3.2@3228.35,2545.28 R3.2@3228.35,2899.61 R3.2@3228.35,3253.94 R3.2@3228.35,3608.27 R3.2@3228.35,3962.6 R3.2@3228.35,4316.93 R3.2@3228.35,4671.26 R4.1@2474.41,1555.12 R4.1@2474.41,2263.78 R4.1@2474.41,2618.11 R4.1@2474.41,2972.44 R4.1@2474.41,3326.77 R4.1@2474.41,3681.1 R4.1@2474.41,4035.43 R4.1@2474.41,4389.76 R4.1@2474.41,4744.09 R4.2@2407.48,1555.12 R4.2@2407.48,2263.78 R4.2@2407.48,2618.11 R4.2@2407.48,2972.44 R4.2@2407.48,3326.77 R4.2@2407.48,3681.1 R4.2@2407.48,4035.43 R4.2@2407.48,4389.76 R4.2@2407.48,4744.09 R5.1@2474.41,1476.38 R5.1@2474.41,2185.04 R5.1@2474.41,2539.37 R5.1@2474.41,2893.7 R5.1@2474.41,3248.03 R5.1@2474.41,3602.36 R5.1@2474.41,3956.69 R5.1@2474.41,4311.02 R5.1@2474.41,4665.35 R5.2@2407.48,1476.38 R5.2@2407.48,2185.04 R5.2@2407.48,2539.37 R5.2@2407.48,2893.7 R5.2@2407.48,3248.03 R5.2@2407.48,3602.36 R5.2@2407.48,3956.69 R5.2@2407.48,4311.02 R5.2@2407.48,4665.35 R6.1@2775.59,1549.21 R6.1@2775.59,2257.87 R6.1@2775.59,2612.2 R6.1@2775.59,2966.54 R6.1@2775.59,3320.87 R6.1@2775.59,3675.2 R6.1@2775.59,4029.53 R6.1@2775.59,4383.86 R6.1@2775.59,4738.19 R6.2@2775.59,1482.28 R6.2@2775.59,2190.94 R6.2@2775.59,2545.28 R6.2@2775.59,2899.61 R6.2@2775.59,3253.94 R6.2@2775.59,3608.27 R6.2@2775.59,3962.6 R6.2@2775.59,4316.93 R6.2@2775.59,4671.26 R7.1@2001.97,1555.12 R7.1@2001.97,2263.78 R7.1@2001.97,2618.11 R7.1@2001.97,2972.44 R7.1@2001.97,3326.77 R7.1@2001.97,3681.1 R7.1@2001.97,4035.43 R7.1@2001.97,4389.76 R7.1@2001.97,4744.09 R7.2@1935.04,1555.12 R7.2@1935.04,2263.78 R7.2@1935.04,2618.11 R7.2@1935.04,2972.44 R7.2@1935.04,3326.77 R7.2@1935.04,3681.1 R7.2@1935.04,4035.43 R7.2@1935.04,4389.76 R7.2@1935.04,4744.09 R8.1@2001.97,1476.38 R8.1@2001.97,2185.04 R8.1@2001.97,2539.37 R8.1@2001.97,2893.7 R8.1@2001.97,3248.03 R8.1@2001.97,3602.36 R8.1@2001.97,3956.69 R8.1@2001.97,4311.02 R8.1@2001.97,4665.35 R8.2@1935.04,1476.38 R8.2@1935.04,2185.04 R8.2@1935.04,2539.37 R8.2@1935.04,2893.7 R8.2@1935.04,3248.03 R8.2@1935.04,3602.36 R8.2@1935.04,3956.69 R8.2@1935.04,4311.02 R8.2@1935.04,4665.35 R9.1@2303.15,1549.21 R9.1@2303.15,2257.87 R9.1@2303.15,2612.2 R9.1@2303.15,2966.54 R9.1@2303.15,3320.87 R9.1@2303.15,3675.2 R9.1@2303.15,4029.53 R9.1@2303.15,4383.86 R9.1@2303.15,4738.19 R9.2@2303.15,1482.28 R9.2@2303.15,2190.94 R9.2@2303.15,2545.28 R9.2@2303.15,2899.61 R9.2@2303.15,3253.94 R9.2@2303.15,3608.27 R9.2@2303.15,3962.6 R9.2@2303.15,4316.93 R9.2@2303.15,4671.26 R10.1@1549.21,1555.12 R10.1@1549.21,2263.78 R10.1@1549.21,2618.11 R10.1@1549.21,2972.44 R10.1@1549.21,3326.77 R10.1@1549.21,3681.1 R10.1@1549.21,4035.43 R10.1@1549.21,4389.76 R10.1@1549.21,4744.09 R10.2@1482.28,1555.12 R10.2@1482.28,2263.78 R10.2@1482.28,2618.11 R10.2@1482.28,2972.44 R10.2@1482.28,3326.77 R10.2@1482.28,3681.1 R10.2@1482.28,4035.43 R10.2@1482.28,4389.76 R10.2@1482.28,4744.09 R11.1@1549.21,1476.38 R11.1@1549.21,2185.04 R11.1@1549.21,2539.37 R11.1@1549.21,2893.7 R11.1@1549.21,3248.03 R11.1@1549.21,3602.36 R11.1@1549.21,3956.69 R11.1@1549.21,4311.02 R11.1@1549.21,4665.35 R11.2@1482.28,1476.38 R11.2@1482.28,2185.04 R11.2@1482.28,2539.37 R11.2@1482.28,2893.7 R11.2@1482.28,3248.03 R11.2@1482.28,3602.36 R11.2@1482.28,3956.69 R11.2@1482.28,4311.02 R11.2@1482.28,4665.35 R12.1@1850.39,1549.21 R12.1@1850.39,2257.87 R12.1@1850.39,2612.2 R12.1@1850.39,2966.54 R12.1@1850.39,3320.87 R12.1@1850.39,3675.2 R12.1@1850.39,4029.53 R12.1@1850.39,4383.86 R12.1@1850.39,4738.19 R12.2@1850.39,1482.28 R12.2@1850.39,2190.94 R12.2@1850.39,2545.28 R12.2@1850.39,2899.61 R12.2@1850.39,3253.94 R12.2@1850.39,3608.27 R12.2@1850.39,3962.6 R12.2@1850.39,4316.93 R12.2@1850.39,4671.26
copper on no net: | length 148822.4